# EAGLE board PIC18F2550.v1b (EAGLE 5.07)
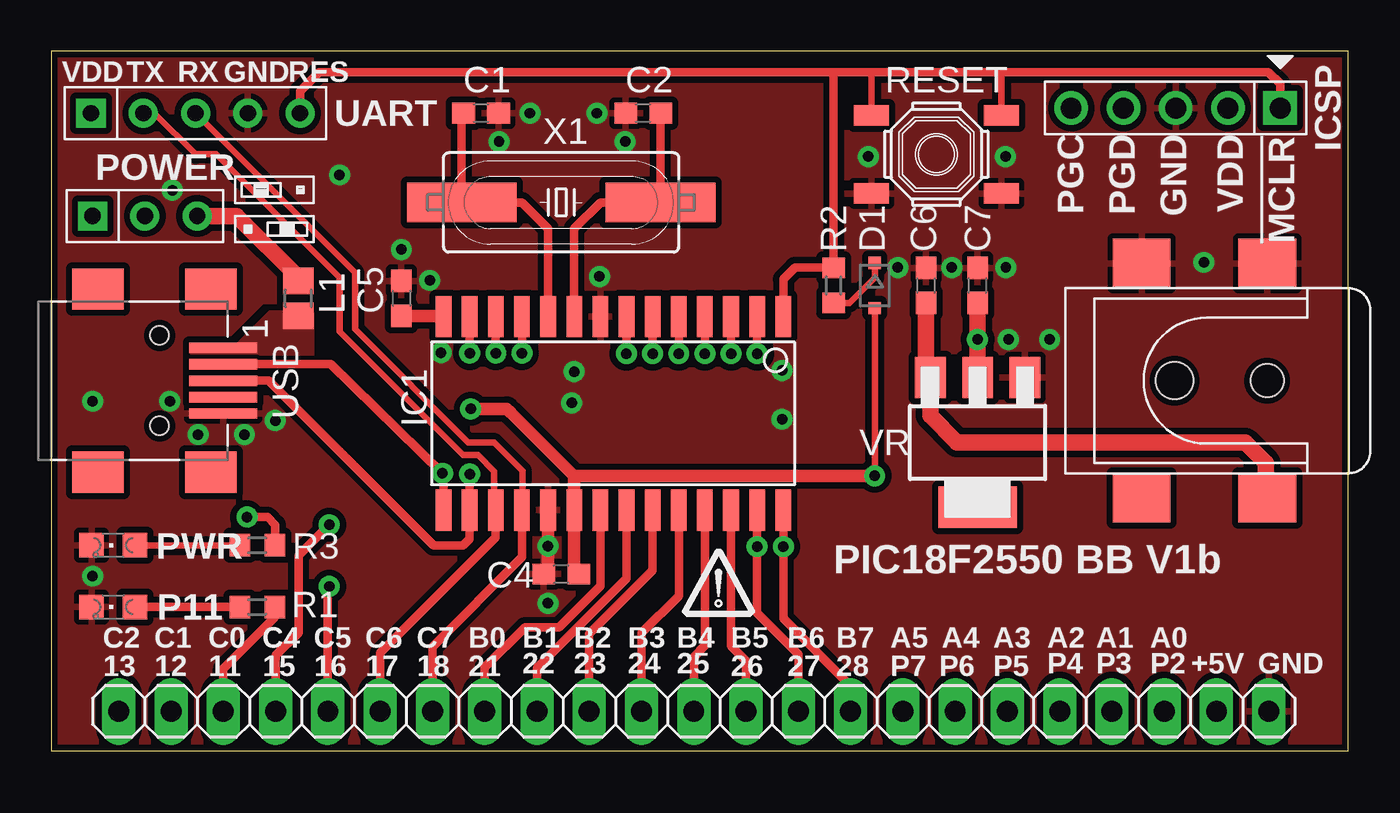
[diagram p0: board, top side]
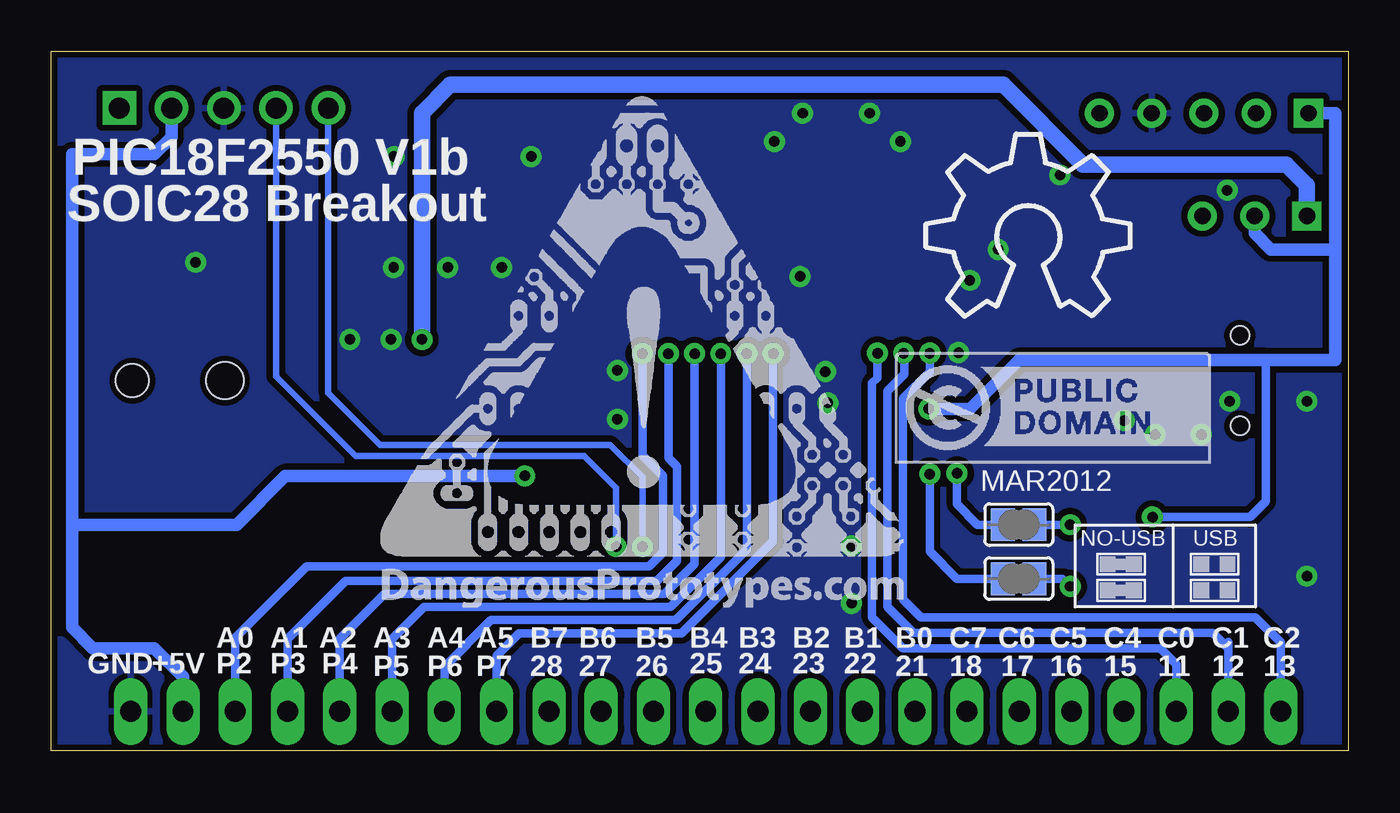
[diagram p1: board, bottom side, seen from below]

Size 63 x 34 mm. Coordinates in mm from the lower left corner, seen from the top.
Outline: 0,0 63,0 63,34 0,34 0,0
Copper layers (1*16): Top 0.035mm / dielectric 1.5mm / Bottom 0.035mm
Design rules "SparkFun": minimum track width 8mil, minimum drill 20mil, track to track 8mil, track to pad 8mil, pad to pad 8mil, via to via 8mil, smd to smd 8mil, copper to edge 10mil, drill to drill 8mil, minimum pad ring 12mil, minimum via ring 10mil, stop-mask expansion 4mil, vias tented up to drill 25mil, thermal gap 10mil

## Footprints (pad centres in the part's own frame; a part is rotated, then mirrored left to right if it is on the bottom)
C603 = smd 1.1 x 1: 1 -0.85,0; 2 0.85,0
DO323 = smd 0.6 x 0.6: A 1.1,0; C -1.1,0
SOIC-28W = smd 0.762 x 2: 1 -8.89,-4.7; 2 -7.62,-4.7; 3 -6.35,-4.7; 4 -5.08,-4.7; 5 -3.81,-4.7; 6 -2.54,-4.7; 7 -1.27,-4.7; 8 0,-4.7; 9 1.27,-4.7; 10 2.54,-4.7; 11 3.81,-4.7; 12 5.08,-4.7; 13 6.35,-4.7; 14 7.62,-4.7; 15 7.62,4.7; 16 6.35,4.7; 17 5.08,4.7; 18 3.81,4.7; 19 2.54,4.7; 20 1.27,4.7; 21 0,4.7; 22 -1.27,4.7; 23 -2.54,4.7; 24 -3.81,4.7; 25 -5.08,4.7; 26 -6.35,4.7; 27 -7.62,4.7; 28 -8.89,4.7
HEADER_PRG_1X05 = drill 1.016 square: 1 -5.08,0 | drill 1.016 round: 2 -2.54,0; 3 0,0; 4 2.54,0; 5 5.08,0
DC_BARREL_JACK_SMD_2MM = smd 2.4 x 2.8: P1@1 -5.7,3.875; P1@2 -5.7,-2.225; P2 5.7,-2.225; P3 5.7,3.875 | hole 1.8: 0,2.275 | hole 1.6: 0,-2.225
1X22 = drill 1.016 long: 1 -26.67,0; 2 -24.13,0; 3 -21.59,0; 4 -19.05,0; 5 -16.51,0; 6 -13.97,0; 7 -11.43,0; 8 -8.89,0; 9 -6.35,0; 10 -3.81,0; 11 -1.27,0; 12 1.27,0; 13 3.81,0; 14 6.35,0; 15 8.89,0; 16 11.43,0; 17 13.97,0; 18 16.51,0; 19 19.05,0; 20 21.59,0; 21 24.13,0; 22 26.67,0; 23 29.21,0
FB603 = smd 1.3 x 1.5: 1 -0.85,0; 2 0.85,0
LED-805 = smd 1.2 x 1.2: A 0,-1.05; C 0,1.05
M1X3 = drill 0.8 square: 1 0,0 | drill 0.8 round: 2 2.54,0; 3 5.08,0
R603 = smd 1 x 1.1: 1 -0.85,0; 2 0.85,0
SW_TACT_SMALL = smd 1.7 x 1: 1 -3.15,1.9; 2 3.15,1.9; 3 -3.15,-1.9; 4 3.15,-1.9
SJ = smd 1.168 x 1.6: 1 -0.762,0; 2 0.762,0
M1X5 = drill 0.8 square: 1 -5.08,0 | drill 0.8 round: 2 -2.54,0; 3 0,0; 4 2.54,0; 5 5.08,0
CONN_USB_MINI-B = smd 2 x 2.5: BODY@1 -4.45,2.5; BODY@2 4.45,2.5; BODY@3 4.45,-3; BODY@4 -4.45,-3 | smd 0.5 x 3.3: D+ 0,3.1; D- -0.8,3.1; GND 1.6,3.1; ID 0.8,3.1; VUSB -1.6,3.1 | hole 0.9: -2.2,0; 2.2,0
SOT223 = smd 1.5 x 2: 1 -2.3,-3.15; 2 0,-3.15; 3 2.3,-3.15 | smd 3.8 x 2: 4 0,3.15
HC-49U = smd 5.334 x 1.93: 1 -4.826,0; 2 4.826,0

## Placement (x,y rotation side)
C1  27pF  [C603]  20.88,31 0 top
C2  27pF  [C603]  28.75,31 180 top
C4  0.1uF  [C603]  24.77,8.6 180 top
C5  0.22uF  [C603]  17,22 270 top
C6  0.1uF  [C603]  42.5,22.62 90 top
C7  10uF  [C603]  45,22.62 90 top
D1  1N4148  [DO323]  40,22.62 270 top
IC1  IC_UC_PIC18FJ250-SOIC-28-W  [SOIC-28W]  26.67,16.41 180 top
ICSP  HEADER_PRG_PIC_ICSPA  [HEADER_PRG_1X05]  54.62,31.25 180 top
J1  [DC_BARREL_JACK_SMD_2MM]  56.85,18 90 top
JP1  [1X22]  29.94,1.93 0 top
L1  500mA  [FB603]  12,22 90 top
P11  YELLOW  [LED-805]  3,7 90 top
POWER  HEADER1X3PTH  [M1X3]  2,26 0 top
PWR  RED  [LED-805]  3,10 90 top
R1  1k  [R603]  10,7 0 top
R2  10k  [R603]  38,22.62 270 top
R3  1k  [R603]  10,10 0 top
RESET  [SW_TACT_SMALL]  43,29 180 top
SJ1  [SJ]  16,8.38 180 bottom
SJ2  [SJ]  16,11 180 bottom
U$1  DINA4_L  [DP_LOGO]  32.41,7.17 0 top
U$4  JUMP3_DESC  [JUMP3_DESC]  14,26 0 top
U$5  [DP_LOGO_ART_1X1]  47,7 0 bottom
U$6  [LOGO_CC-0]  22,14 0 bottom
U$7  [OSHW_10X350_NOTEXT]  20.5,21.12 0 bottom
UART  HEADER1X5PTH  [M1X5]  7,31 0 top
USB  CON-USB-MINI-BUSB1  [CONN_USB_MINI-B]  5.25,18 270 top
VR  LD1117S50  [SOT223]  45,15 180 top
X1  16Mhz  [HC-49U]  24.77,26.66 0 top

## Library data of the parts
C1 C2 C4-C7 D1 IC1 ICSP J1 L1 P11 POWER PWR R1-R3 RESET U$5 U$6 UART USB VR X1 = dp_devices
JP1 = pinhead
SJ1 SJ2 = jumper
U$1 = dp_devices; LICENSE: CC-0; PROJECT: PIC18F2550 BB
U$4 = dp_devices; LEFT: DCIN; RIGHT: USB
U$7 = ohw-logo

## Nets
5V: C7.1 POWER.1 VR.2
DCIN: C6.1 J1.P1@2 VR.3
GND: C1.2 C2.2 C4.2 C5.1 C6.2 C7.2 IC1.8 IC1.19 ICSP.3 J1.P2 J1.P3 JP1.23 P11.C PWR.C RESET.1 RESET.2 UART.4 USB.GND VR.1
MCLR: IC1.1 ICSP.1 R2.1 RESET.3 RESET.4 UART.5
N$1: JP1.4 SJ2.1
N$2: PWR.A R3.1
N$3: JP1.5 SJ1.1
N$4: D1.C R2.2
N$5: P11.A R1.1
OSCI: C2.1 IC1.9 X1.2
OSCO: C1.1 IC1.10 X1.1
P02: IC1.2 JP1.21
P03: IC1.3 JP1.20
P04: IC1.4 JP1.19
P05: IC1.5 JP1.18
P06: IC1.6 JP1.17
P07: IC1.7 JP1.16
P11: IC1.11 JP1.3 R1.2
P12: IC1.12 JP1.2
P13: IC1.13 JP1.1
P14: C5.2 IC1.14
P15/D-: IC1.15 SJ2.2 USB.D-
P16/D+: IC1.16 SJ1.2 USB.D+
P21: IC1.21 JP1.8
P22: IC1.22 JP1.9
P23: IC1.23 JP1.10
P24: IC1.24 JP1.11
P25: IC1.25 JP1.12
P26: IC1.26 JP1.13
P27: IC1.27 ICSP.5 JP1.14
P28: IC1.28 ICSP.4 JP1.15
RX: IC1.18 JP1.7 UART.3
TX: IC1.17 JP1.6 UART.2
VDD: C4.1 D1.A IC1.20 ICSP.2 JP1.22 POWER.2 R3.2 UART.1
VUSB: L1.1 USB.VUSB
VUSBO: L1.2 POWER.3

## Tracks (layer width: path | path; a pad name or v marks a point on that pad's centre or on a via)
5V  (via drill 0.51)
  Top 0.813: VR.2 v45,20 C7.1
  Bottom 0.813: v45,20 45,31 43.62,32.38 16.75,32.38 12.88,28.5 3,28.5 2,27.5 POWER.1
DCIN
  Top 0.813: C6.1 42.5,18.35 VR.3 42.7,16.3 44,15 58,15 59,14 59,12.37 J1.P1@2
GND  (via drill 0.51)
  Top 0.61: IC1.19 24.13,8.88 C4.2
  other vias: 2,8.5 5.75,17 7.12,15.38 9.38,15.38 25.27,16.92 24.12,7.18 35.5,16.12 25.4,18.44 18.92,19.36 17,24.38 39.69,28.89 27.88,29.62 23.25,31 26.5,31 56,23.75 48.5,20 43.75,23.5 41.12,23.5 46.38,23.5 24.12,9.97 18.38,22.88 14,28 5.88,27.25 46.35,28.89 46.5,20 21.75,29.62 26.62,23.07 10.88,16.06 35.5,18.5 2,17
  pour Top (isolate 0.305, rank 6): 0,0 63,0 63,34 0,34
  pour Bottom (isolate 0.305, rank 6): 0,0 63,0 63,34 0,34
MCLR
  Top 0.305: IC1.1 35.56,21.07 35.62,21 | RESET.4 39.85,33 39.37,33 | RESET.3 46.15,33 45.72,33
  Top 0.406: UART.5 12.08,32.08 13,33 38,33 | 38,33 39.37,33 45.72,33 59.12,33 59.7,32.42 ICSP.1 | 38,33 R2.1 37.98,23.5 36.12,23.5 35.56,22.93 IC1.1
N$1  (via drill 0.51)
  Top 0.406: JP1.4 10.89,4.64 12,5.75 12,9.5 v13.5,11
  Bottom 0.406: v13.5,11 SJ2.1
N$2
  Top 0.305: PWR.A R3.1
N$3  (via drill 0.51)
  Top 0.406: JP1.5 13.43,7.93 v13.5,8
  Bottom 0.406: SJ1.1 13.88,8.38 v13.5,8
N$4
  Top 0.305: R2.2 38.77,21.77 40,23 D1.C
N$5
  Top 0.406: P11.A R1.1
OSCI
  Top 0.406: IC1.9 25.4,25.39 26.67,26.66 X1.2 C2.1
OSCO
  Top 0.406: IC1.10 24.13,25.39 22.86,26.66 X1.1 19.94,30.91 C1.1
P02  (via drill 0.51)
  Top 0.406: v34.29,19.31 IC1.2
  Bottom 0.406: v34.29,19.31 34.29,14.37 33.28,13.36 33.28,9.65 33.96,8.97 50.6,8.97 54.07,5.5 JP1.21
P03  (via drill 0.51)
  Top 0.406: v33.02,19.31 IC1.3
  Bottom 0.406: v33.02,19.31 33.02,14.24 32.62,13.84 32.62,9.23 33.58,8.27 48.71,8.27 51.53,5.45 JP1.20
P04  (via drill 0.51)
  Top 0.406: v31.75,19.31 IC1.4
  Bottom 0.406: v31.75,19.31 31.75,9.09 33.2,7.63 46.8,7.63 48.99,5.45 JP1.19
P05  (via drill 0.51)
  Top 0.406: v30.48,19.31 IC1.5
  Bottom 0.406: v30.48,19.31 30.48,9.44 32.92,7 44.9,7 46.45,5.45 JP1.18
P06  (via drill 0.51)
  Top 0.406: v29.21,19.31 IC1.6
  Bottom 0.406: v29.21,19.31 29.21,9.8 32.64,6.36 41.64,6.36 43.91,4.09 JP1.17
P07  (via drill 0.51)
  Top 0.406: v27.94,19.31 IC1.7
  Bottom 0.406: v27.94,19.31 27.94,10.18 32.39,5.73 40.27,5.73 41.37,4.63 JP1.16
P11  (via drill 0.51)
  Top 0.406: v22.86,19.33 IC1.11 | JP1.3 8.35,4 10.85,6.5 R1.2
  Bottom 0.406: JP1.3 8.35,4.22 9.13,5 21.62,5 23.12,6.5 23.12,17.88 22.86,18.14 v22.86,19.33
P12  (via drill 0.51)
  Top 0.406: v21.59,19.33 IC1.12
  Bottom 0.406: v21.59,19.33 21.57,19.31 21.57,18.31 22.38,17.5 22.38,7 21.12,5.75 6.56,5.75 5.81,5 | JP1.2 5.81,5 | 5.81,5 5.81,5.31
P13  (via drill 0.51)
  Top 0.406: v20.32,19.33 IC1.13
  Bottom 0.406: v20.32,19.33 20.32,18.43 21.62,17.12 21.62,7.38 20.75,6.5 4.5,6.5 3.27,5.27 JP1.1
P14
  Top 0.61: C5.2 19.01,21.15 IC1.14
P15/D-  (via drill 0.51)
  Top 0.406: 19.05,11.96 IC1.15 19.05,13.45 v19,13.5 13.57,18.8 USB.D-
  Bottom 0.406: v19,13.5 19,12 18,11 SJ2.2
P16/D+  (via drill 0.51)
  Top 0.406: v20.32,13.46 IC1.16 20.32,10.32 20,10 18.56,10 10.56,18 USB.D+
  Bottom 0.406: v20.32,13.46 20.32,9.7 19,8.38 SJ1.2
P21
  Top 0.406: IC1.21 26.67,8.01 24.66,6.01 23,6.01 21.05,4.06 JP1.8
P22
  Top 0.406: IC1.22 27.94,8.39 23.59,4.04 JP1.9
P23
  Top 0.406: IC1.23 29.21,8.78 26.13,5.7 JP1.10
P24
  Top 0.406: IC1.24 30.48,7.54 28.67,5.73 JP1.11
P25
  Top 0.406: IC1.25 31.75,5.12 31.21,4.58 JP1.12
P26
  Top 0.406: IC1.26 33.02,5.11 33.75,4.38 JP1.13
P27  (via drill 0.51)
  Top 0.406: IC1.27 v34.29,9.93 34.29,6.71 36.29,4.71 JP1.14
  Bottom 0.305: v34.29,9.93 34.29,13.31 35.86,14.88 47.03,14.88 49.55,17.4 ICSP.5
P28  (via drill 0.51)
  Top 0.406: IC1.28 v35.56,9.93 35.56,6.44 38.83,3.17 JP1.15
  Bottom 0.305: v35.56,9.93 35.56,12.78 37.12,14.35 48.23,14.35 52.09,18.2 ICSP.4
RX
  Top 0.305: IC1.18 22.89,11.65 22.89,13.61 21.5,15 20.25,15 14.75,20.5 14.75,23.25 UART.3
  Top 0.406: IC1.18 22.86,9.42 18.51,5.07 JP1.7
TX
  Top 0.305: IC1.17 21.51,11.71 21.51,13.59 20.73,14.38 20,14.38 14,20.38 14,23 8,29 7,29 5,31 UART.2
  Top 0.406: IC1.17 21.59,10.39 15.97,4.77 JP1.6
VDD  (via drill 0.51)
  Top 0.305: v40,13.38 D1.A
  Top 0.406: v9.5,11.38 10.5,11.38 10.88,11 10.88,10.03 R3.2
  Top 0.61: 25.4,13.36 IC1.20 25.4,8.94 C4.1 | 25.4,13.36 v40,13.38 | 25.4,13.36 22.31,16.45 22.3,16.45 22.12,16.62 v20.38,16.62
  Bottom 0.406: v9.5,11.38 4.75,11.38 4,12.12 4,19
  Bottom 0.61: v40,13.38 43.77,13.36 51.64,13.36 54,11 62,11 | 62,11 62,6 61,5 58,5 56.61,3.61 JP1.22 | 62,11 62,29 58,29 57.16,29.84 ICSP.2 | v20.38,16.62 18.38,16.62 16,19 4,19 0.62,19 0.62,24.38 | 0.62,24.38 0.62,31 UART.1 | POWER.2 4.54,25.16 3.75,24.38 0.62,24.38
VUSB
  pour Top (no thermals): 6.88,18.38 6.88,19.62 9,19.62 10.62,21.25 12.62,21.25 12.62,18.5 12.5,18.38
VUSBO
  Top 0.813: L1.2 12,23 9,26 POWER.3

## Text on the board
tNames: VDD | TX | RX | GND | RES | UART | PGC | PGD | GND | VDD | !MCLR | POWER | PIC18F2550 BB V1b | C2 | C1 | C0 | C4 | C5 | C6 | C7 | B0 | B1 | B2 | B3 | B4 | B5 | B6 | B7 | A5 | A4 | A3 | A2 | A1 | A0 | 13 | 12 | 11 | 15 | 16 | 17 | 18 | 21 | 22 | 23 | 24 | 25 | 26 | 27 | 28 | P7 | P6 | P5 | P4 | P3 | P2 | +5V | GND
bNames: PIC18F2550 V1b | SOIC28 Breakout | MAR2012 | USB | NO-USB | C2 | C1 | C0 | C4 | C5 | C6 | C7 | B0 | B1 | B2 | B3 | B4 | B5 | B6 | B7 | A5 | A4 | A3 | A2 | A1 | A0 | 13 | 12 | 11 | 15 | 16 | 17 | 18 | 21 | 22 | 23 | 24 | 25 | 26 | 27 | 28 | P7 | P6 | P5 | P4 | P3 | P2 | +5V | GND